# EAGLE board Sborka TMFM (EAGLE 6.0)
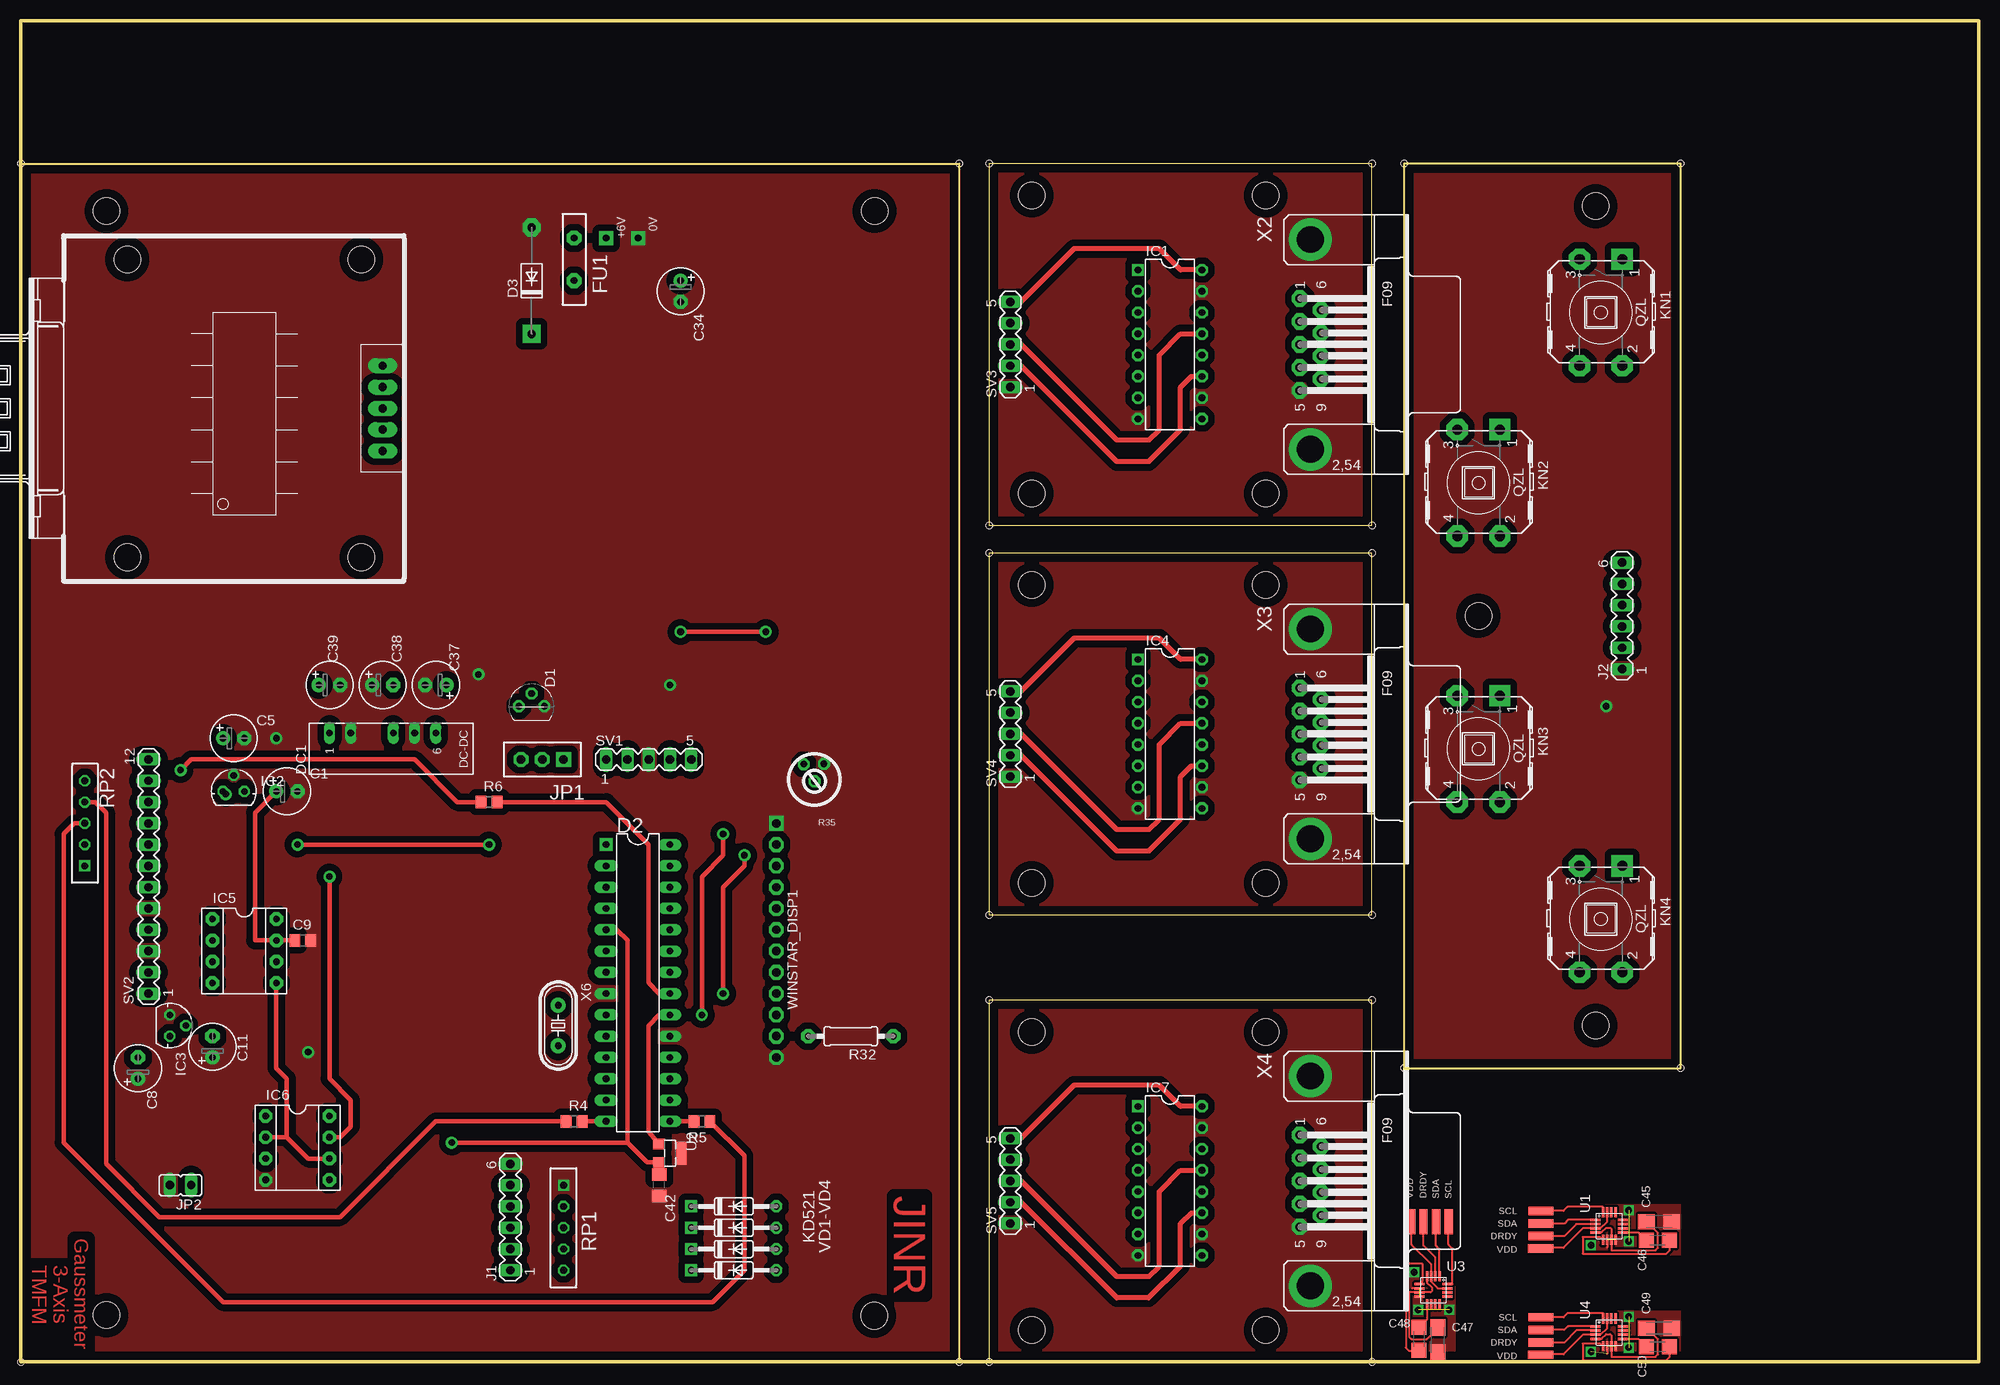
[diagram p0: board, top side]
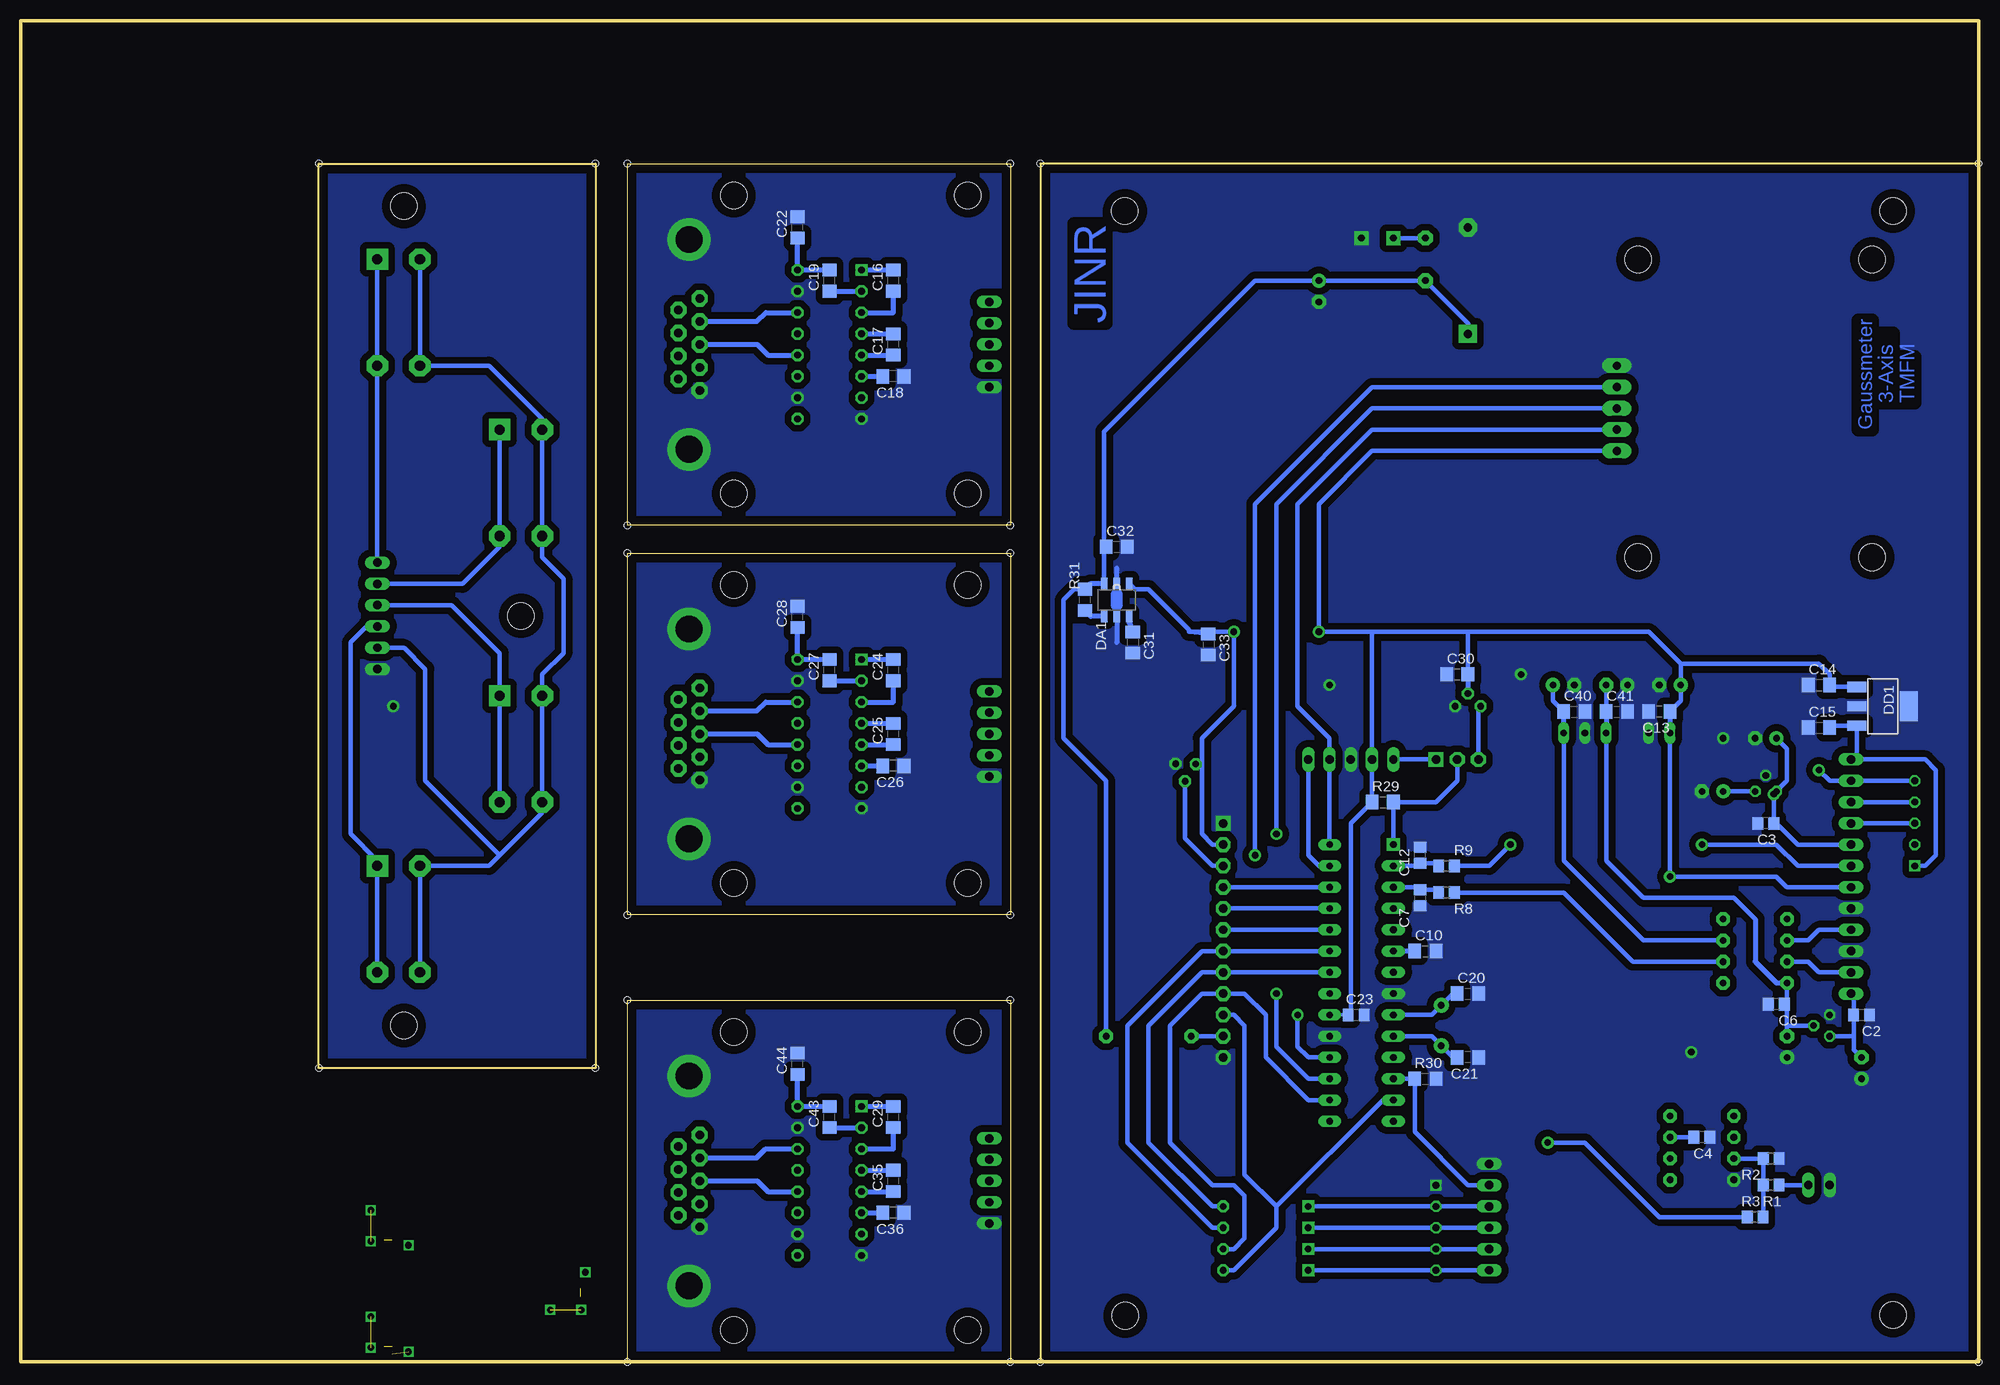
[diagram p1: board, bottom side, seen from below]

Size 233.68 x 160.02 mm. Coordinates in mm from the lower left corner, seen from the top.
Outline: 162.56,0 0,0 0,160.02 233.68,160.02 233.68,0 162.56,0
Outline: 116.84,0 162.56,0
Outline: 0,143.51 0,0.51
Outline: 0,143 112,143 112,0 0,0 0,143
Outline: 161.29,99.82 161.29,142.98 115.57,143 115.57,99.82 161.29,99.82
Outline: 161.29,53.34 161.29,96.5 115.57,96.52 115.57,53.34 161.29,53.34
Outline: 161.29,0 161.29,43.16 115.57,43.18 115.57,0 161.29,0
Outline: 165.1,143 165.1,35.05 198.12,35.05 198.12,143 165.1,143
Copper layers (1*16): Top 0.035mm / dielectric 1.5mm / Bottom 0.035mm
Design rules: minimum track width 10mil, minimum drill 24mil, track to track 8mil, track to pad 8mil, pad to pad 8mil, via to via 8mil, smd to smd 8mil, copper to edge 40mil, drill to drill 8mil, minimum pad ring 10mil, minimum via ring 8mil, stop-mask expansion 4mil, vias tented up to drill 0mil, thermal gap 10mil
Holes 3.2 mm at 101.91,137.34 101.85,5.5 10.21,137.34 10.21,5.57 148.59,139.19 148.59,103.63 120.65,103.63 120.65,139.19 148.59,92.71 148.59,57.15 120.65,57.15 120.65,92.71 148.59,39.37 148.59,3.81 120.65,3.81 120.65,39.37 187.96,137.92 187.96,40.13 173.99,89.03
Holes 0.8 mm at 0,143 112.01,143 112.01,0 0,0 161.29,99.82 161.29,143 115.57,143 115.57,99.82 161.29,53.34 161.29,96.52 115.57,96.52 115.57,53.34 161.29,0 161.29,43.18 115.57,43.18 115.57,0 198.12,143 165.1,143 165.1,35.05 198.12,35.05

## Footprints (pad centres in the part's own frame; a part is rotated, then mirrored left to right if it is on the bottom)
PIN1 = drill 0.8 pad 1.676 square: P$1 0,0
E2,5-6 = drill 0.8 pad 1.676: + -1.27,0 | drill 0.8 pad 1.676 octagon: - 1.27,0
C0805 = smd 1.3 x 1.5: 1 -0.95,0; 2 0.95,0
C0805D = smd 1.5 x 1.7: 1 -1.27,0; 2 1.27,0
C1206K = smd 2 x 1.8: 1 -1.5,0; 2 1.5,0
C0805K = smd 1.8 x 1.8: 1 -1.381,0; 2 1.381,0
TO92-60 = drill 0.8 pad 1.422 octagon: 1 -1.524,0; 2 0,1.524; 3 1.524,0
DIL28-3 = drill 0.8 pad 1.5 square: 1 -16.51,-3.81 | drill 0.8 pad 1.4 long: 2 -13.97,-3.81; 3 -11.43,-3.81; 4 -8.89,-3.81; 5 -6.35,-3.81; 6 -3.81,-3.81; 7 -1.27,-3.81; 8 1.27,-3.81; 9 3.81,-3.81; 10 6.35,-3.81; 11 8.89,-3.81; 12 11.43,-3.81; 13 13.97,-3.81; 14 16.51,-3.81; 15 16.51,3.81; 16 13.97,3.81; 17 11.43,3.81; 18 8.89,3.81; 19 6.35,3.81; 20 3.81,3.81; 21 1.27,3.81; 22 -1.27,3.81; 23 -3.81,3.81; 24 -6.35,3.81; 25 -8.89,3.81; 26 -11.43,3.81; 27 -13.97,3.81; 28 -16.51,3.81
DO41-10 = drill 1 pad 2.184 octagon: A 12.7,0 | drill 1 pad 2.184 square: C 0,0
SOT89-5 = smd 0.8 x 1.4: 1 -1.499,-1.981; 2 0,-1.981; 3 1.499,-1.981; 4 1.499,1.919; 5 -1.499,1.919; 21 0,1.919
NMA@1 = drill 0.8 long: 1 0,6.35; 2 0,3.81; 4 0,-1.27; 5 0,-3.81; 6 0,-6.35
SOT223 = smd 1.219 x 2.235: GND 0,-3.099; INPUT -2.311,-3.099; OUTPUT 2.311,-3.099 | smd 3.6 x 2.2: GND@1 0,3.099
RA90 = drill 0.8 pad 1.778 octagon: P$1 -2.54,0; P$2 2.54,0
DIL16 = drill 0.8 pad 1.422 square: 1 -8.89,-3.81 | drill 0.8 pad 1.422 octagon: 2 -6.35,-3.81; 3 -3.81,-3.81; 4 -1.27,-3.81; 5 1.27,-3.81; 6 3.81,-3.81; 7 6.35,-3.81; 8 8.89,-3.81; 9 8.89,3.81; 10 6.35,3.81; 11 3.81,3.81; 12 1.27,3.81; 13 -1.27,3.81; 14 -3.81,3.81; 15 -6.35,3.81; 16 -8.89,3.81
78LXX = drill 0.8 octagon: GND 0,1.905; IN 1.27,0; OUT -1.27,0
79LXX = drill 0.8 octagon: GND -1.27,0; IN 0,1.905; OUT 1.27,0
DIL08@1 = drill 0.8 pad 1.6 octagon: 1 -3.81,-3.81; 2 -1.27,-3.81; 3 1.27,-3.81; 4 3.81,-3.81; 5 3.81,3.81; 6 1.27,3.81; 7 -1.27,3.81; 8 -3.81,3.81
MA06-1@1 = drill 1 long: 1 -6.35,0; 2 -3.81,0; 3 -1.27,0; 4 1.27,0; 5 3.81,0; 6 6.35,0
MA06-1 = drill 1 long: 1 -6.35,0; 2 -3.81,0; 3 -1.27,0; 4 1.27,0; 5 3.81,0; 6 6.35,0
PLC-3PIN = drill 1 pad 1.778 square: P$1 0,0 | drill 1 pad 1.778 octagon: P$2 2.54,0; P$3 5.08,0
JP1@1 = drill 1 long: 1 0,-1.27; 2 0,1.27
LZQ-KN = drill 1.2 pad 2.54 square: 1 -6.35,2.54 | drill 1.2 pad 2.54 octagon: 2 6.35,2.54; 3 -6.35,-2.54; 4 6.35,-2.54
1_PIN_PLANAR = smd 3 x 1: P$1 0,0
R0805 = smd 1.3 x 1.5: 1 -0.95,0; 2 0.95,0
R0805D = smd 1.5 x 1.7: P$1 -1.27,0; P$2 1.27,0
0207/10 = drill 0.8 pad 1.676 octagon: 1 -5.08,0; 2 5.08,0
RTRIM3329H = drill 0.8 pad 1.422 octagon: 1 -0.599,-2.024; 2 1.805,-1.985; 3 0.537,0.066
SIP5 = drill 0.8 square: 1 0,0 | drill 0.8 octagon: 2 0,-2.54; 3 0,-5.08; 4 0,-7.62; 5 0,-10.16
MA05-1@1 = drill 1 long: 1 -5.08,0; 2 -2.54,0; 3 0,0; 4 2.54,0; 5 5.08,0
MA12-1 = drill 1 long: 1 -13.97,0; 2 -11.43,0; 3 -8.89,0; 4 -6.35,0; 5 -3.81,0; 6 -1.27,0; 7 1.27,0; 8 3.81,0; 9 6.35,0; 10 8.89,0; 11 11.43,0; 12 13.97,0
MA05-1 = drill 1 long: 1 -5.08,0; 2 -2.54,0; 3 0,0; 4 2.54,0; 5 5.08,0
QFN16-4X4 = smd 1.2 x 0.3: P$1 1.647,0.832; P$2 1.647,0.332; P$3 1.647,-0.168; P$4 1.647,-0.668; P$9 -1.671,-0.672; P$10 -1.671,-0.172; P$11 -1.671,0.328; P$12 -1.671,0.828 | smd 0.3 x 1.2: P$5 0.718,-1.563; P$6 0.218,-1.563; P$7 -0.282,-1.563; P$8 -0.782,-1.563; P$13 -0.779,1.745; P$14 -0.279,1.745; P$15 0.221,1.745; P$16 0.721,1.745
SOT23-W = smd 2.8 x 1.4: GND 0,1.3 | smd 1.2 x 1.4: IN -1.1,-1.3; OUT 1.1,-1.3
DO35-10 = drill 0.8 pad 1.422 octagon: A 5.08,0 | drill 0.8 pad 1.422 square: C -5.08,0
WINSTAR16X4_12 = drill 1 pad 1.778 square: P$1 -13.97,1.27 | drill 1 pad 1.778 octagon: P$2 -11.43,1.27; P$3 -8.89,1.27; P$4 -6.35,1.27; P$5 -3.81,1.27; P$6 -1.27,1.27; P$7 1.27,1.27; P$8 3.81,1.27; P$9 6.35,1.27; P$10 8.89,1.27; P$11 11.43,1.27; P$12 13.97,1.27
KM_RS_232 = drill 1 pad 1.778 long: 1 20.32,5.08; 2 20.32,2.54; 3 20.32,0; 4 20.32,-2.54; 5 20.32,-5.08 | hole 3.2: -10.16,17.78; -10.16,-17.78; 17.78,17.78; 17.78,-17.78
F09HP = drill 1 pad 1.93 octagon: 1 -5.486,-1.27; 2 -2.743,-1.27; 3 0,-1.27; 4 2.743,-1.27; 5 5.486,-1.27; 6 -4.115,1.27; 7 -1.372,1.27; 8 1.372,1.27; 9 4.115,1.27 | drill 3.2 pad 5.08: G1 -12.522,0; G2 12.522,0
HC49/S = drill 0.8 pad 1.778: 1 -2.413,0; 2 2.413,0

## Placement (x,y rotation side)
0V  PIN1  [PIN1]  73.66,134.11 270 top
+6V  PIN1  [PIN1]  69.85,134.11 270 top
C1  100 uF  [E2,5-6]  31.75,68.07 0 top
C2  0.1  [C0805]  13.97,41.4 0 bottom
C3  0.1  [C0805]  25.4,64.26 180 bottom
C4  0,1  [C0805]  33.02,26.8 180 bottom
C5  100 uF  [E2,5-6]  25.4,74.42 0 top
C6  0,1  [C0805]  24.13,42.67 180 bottom
C7  0,1  [C0805]  66.67,55.37 270 bottom
C8  100 uF  [E2,5-6]  13.97,35.05 90 top
C9  0,1  [C0805]  33.66,50.29 0 top
C10  0.1  [C0805D]  66.04,49.02 0 bottom
C11  100 uF  [E2,5-6]  22.86,37.59 90 top
C12  0.1  [C0805]  66.67,60.45 90 bottom
C13  100n  [C0805D]  38.1,77.6 180 bottom
C14  0.1  [C0805D]  19.05,80.77 0 bottom
C15  10uF  [C0805D]  19.05,75.69 0 bottom
C16  [C0805D]  129.54,129.03 90 bottom
C17  [C0805D]  129.54,121.41 90 bottom
C18  [C0805D]  129.54,117.6 180 bottom
C19  [C0805D]  137.16,129.03 90 bottom
C20  16p  [C0805D]  60.96,43.94 0 bottom
C21  16p  [C0805D]  60.96,36.32 180 bottom
C22  [C0805D]  140.97,135.38 90 bottom
C23  0.1  [C0805]  74.3,41.4 0 bottom
C24  [C0805D]  129.54,82.55 90 bottom
C25  [C0805D]  129.54,74.93 90 bottom
C26  [C0805D]  129.54,71.12 180 bottom
C27  [C0805D]  137.16,82.55 90 bottom
C28  [C0805D]  140.97,88.9 90 bottom
C29  [C0805D]  129.54,29.21 90 bottom
C30  0.1  [C0805D]  62.23,82.04 0 bottom
C31  10n  [C0805D]  100.97,85.85 270 bottom
C32  [C0805D]  102.87,97.28 0 bottom
C33  1uF  [C0805D]  91.95,85.6 270 bottom
C34  100uFx25v  [E2,5-6]  78.74,127.76 270 top
C35  [C0805D]  129.54,21.59 90 bottom
C36  [C0805D]  129.54,17.78 180 bottom
C37  100uFx25V  [E2,5-6]  49.53,80.77 180 top
C38  100uFx25V  [E2,5-6]  43.18,80.77 0 top
C39  100uFx25V  [E2,5-6]  36.83,80.77 0 top
C40  0.1  [C0805D]  48.26,77.6 0 bottom
C41  0.1  [C0805D]  43.18,77.6 0 bottom
C42  1uF  [C0805D]  76.2,21.08 90 top
C43  [C0805D]  137.16,29.21 90 bottom
C44  [C0805D]  140.97,35.56 90 bottom
C45  4.7  [C1206K]  195.53,16.73 0 top
C46  0.22  [C0805K]  195.38,14.49 0 top
C47  4.7  [C1206K]  169.13,2.59 270 top
C48  0.22  [C0805K]  166.89,2.74 270 top
C49  4.7  [C1206K]  195.53,4.03 0 top
C50  0.22  [C0805K]  195.38,1.79 0 top
D1  DS1811  [TO92-60]  60.96,78.23 0 top
D2  PIC18F25k80DIP  [DIL28-3]  73.66,45.21 270 top
D3  1N5061  [DO41-10]  60.96,122.68 90 top
DA1  NJM2880  [SOT89-5]  102.87,90.93 0 bottom
DC1  [NMA@1]  43.18,75.06 90 top
DD1  LM2937  [SOT223]  11.43,78.23 270 bottom
FU1  RA90  [RA90]  66.04,131.57 270 top
IC1  MAX232  [DIL16]  137.16,121.41 270 top
IC2  78L05  [78LXX]  25.4,68.07 0 top
IC3  79L05  [79LXX]  17.78,40.13 270 top
IC4  MAX232  [DIL16]  137.16,74.93 270 top
IC5  INA128P  [DIL08@1]  26.67,49.02 270 top
IC6  OPA340P  [DIL08@1]  33.02,25.53 270 top
IC7  MAX232  [DIL16]  137.16,21.59 270 top
J1  [MA06-1@1]  58.42,17.27 90 top
J2  [MA06-1]  191.13,89.03 90 top
JP1  JP3PIN  [PLC-3PIN]  64.77,71.88 180 top
JP2  [JP1@1]  19.05,21.08 90 top
KN1  LZQ-KN  [LZQ-KN]  188.59,125.22 270 top
KN2  LZQ-KN  [LZQ-KN]  173.99,104.9 270 top
KN3  LZQ-KN  [LZQ-KN]  173.99,73.15 270 top
KN4  LZQ-KN  [LZQ-KN]  188.59,52.83 270 top
P1  SDA  [1_PIN_PLANAR]  181.42,16.51 180 top
P2  VDD 3.3  [1_PIN_PLANAR]  181.41,13.54 180 top
P3  SCL  [1_PIN_PLANAR]  181.41,18.02 180 top
P4  VDD 3.3  [1_PIN_PLANAR]  165.94,16.71 90 top
P5  DRDY  [1_PIN_PLANAR]  181.42,15 0 top
P6  SDA  [1_PIN_PLANAR]  168.91,16.7 90 top
P7  SCL  [1_PIN_PLANAR]  170.42,16.71 90 top
P8  DRDY  [1_PIN_PLANAR]  167.4,16.7 270 top
P9  VDD 3.3  [1_PIN_PLANAR]  181.41,0.84 180 top
P10  SDA  [1_PIN_PLANAR]  181.42,3.81 180 top
P11  SCL  [1_PIN_PLANAR]  181.41,5.32 180 top
P12  DRDY  [1_PIN_PLANAR]  181.42,2.3 0 top
R1  [R0805]  26.67,17.27 180 bottom
R2  [R0805]  24.77,24.26 180 bottom
R3  [R0805]  24.77,21.08 180 bottom
R4  330  [R0805]  66.04,28.7 0 top
R5  330  [R0805]  81.28,28.7 180 top
R6  330  [R0805]  55.88,66.8 0 top
R8  1k  [R0805]  63.5,56.01 180 bottom
R9  1k  [R0805]  63.5,59.18 180 bottom
R29  10k  [R0805D]  71.12,66.8 0 bottom
R30  10k  [R0805D]  66.04,33.78 0 bottom
R31  10K  [R0805D]  106.68,90.93 90 bottom
R32  [0207/10]  99.06,38.86 180 top
R35  15K  [RTRIM3329H]  95.25,69.34 180 top
RP1  [SIP5]  64.77,21.08 0 top
RP2  10k  [SIP5]  7.62,59.18 180 top
SV1  [MA05-1@1]  74.93,71.88 0 top
SV2  [MA12-1]  15.24,57.91 90 top
SV3  [MA05-1]  118.11,121.41 90 top
SV4  [MA05-1]  118.11,74.93 90 top
SV5  [MA05-1]  118.11,21.59 90 top
U1  HMC5883  [QFN16-4X4]  189.67,16.22 90 top
U2  REF3140  [SOT23-W]  77.47,24.89 270 top
U3  HMC5883  [QFN16-4X4]  168.62,8.45 0 top
U4  HMC5883  [QFN16-4X4]  189.67,3.52 90 top
VD1  KD521  [DO35-10]  85.09,18.54 0 top
VD2  KD521  [DO35-10]  85.09,16 0 top
VD3  KD521  [DO35-10]  85.09,13.46 0 top
VD4  KD521  [DO35-10]  85.09,10.92 0 top
WINSTAR_DISP1  [WINSTAR16X4_12]  88.9,50.29 270 top
X1  [KM_RS_232]  22.86,113.79 0 top
X2  [F09HP]  153.92,121.41 270 top
X3  [F09HP]  153.92,74.93 270 top
X4  [F09HP]  153.92,21.59 270 top
X6  10 MHz  [HC49/S]  64.14,40.13 270 top

## Library data of the parts
0V +6V C10 C13-C22 C24-C33 C35 C36 C40-C44 D1-D3 DA1 FU1 IC1 IC4 IC7 JP1 R29-R32 RP1 RP2 VD1-VD4 X6 = den
C1 C5 C8 C11 C34 C37-C39 = D
C2-C4 C6 C7 C9 C12 C23 R1-R6 R8 R9 = rcl
C45-C50 KN1-KN4 P1-P12 R35 U1 U3 U4 WINSTAR_DISP1 X1 = Dmitry
DC1 = dc-dc-converter
DD1 = For TIMP
IC2 IC3 = v-reg
IC5 IC6 = burr-brown
J1 J2 SV1 = con-lstb
JP2 = jumper
SV2-SV5 = con-lstb; OC_FARNELL: unknown; OC_NEWARK: unknown
U2 = ref
X2-X4 = con-subd; OC_FARNELL: unknown; OC_NEWARK: unknown

## Nets
0V: 0V.P$1 C1.- C2.2 C3.2 C4.1 C5.- C6.2 C7.2 C8.+ C9.2 C10.2 C11.+ C12.2 C13.2 C14.1 C15.1 C20.2 C21.1 C23.2 C30.1 C31.2 C32.2 C33.2 C34.- C37.- C38.+ C39.- C40.2 C41.2 C42.1 D1.3 D2.8 D2.19 D3.A DA1.2 DA1.21 DC1.2 DC1.5 DD1.GND DD1.GND@1 IC2.GND IC3.GND IC6.4 J1.6 JP2.2 R2.1 R30.P$2 R35.1 RP1.1 SV1.3 SV2.3 SV2.5 U2.GND WINSTAR_DISP1.P$1 WINSTAR_DISP1.P$12 X1.1
0V1: C18.1 C22.2 IC1.8 IC1.10 IC1.15 SV3.1 X2.5 X2.G1 X2.G2
0V2: C26.1 C28.2 IC4.8 IC4.10 IC4.15 SV4.1 X3.5 X3.G1 X3.G2
0V3: C36.1 C44.2 IC7.8 IC7.10 IC7.15 SV5.1 X4.5 X4.G1 X4.G2
0V4: C45.2 U1.P$9 U1.P$11
0V5: C47.2 U3.P$9 U3.P$11
0V6: C49.2 U4.P$9 U4.P$11
1: U1.P$3
2: U1.P$4
3: U1.P$6
4: U1.P$7
5: U1.P$5
6: U3.P$3
7: U3.P$4
8: U3.P$5
9: U3.P$6
10: U3.P$7
11: U4.P$3
12: U4.P$4
13: U4.P$5
14: U4.P$6
15: U4.P$7
+3V3: C15.2 DD1.OUTPUT RP2.1 SV2.12
+5V: C4.2 C13.1 C14.2 C23.1 C30.2 C33.1 C39.+ D1.2 D2.20 DA1.4 DC1.1 DD1.INPUT IC6.7 R29.P$1 R35.2 SV1.2 SV2.6 U2.IN WINSTAR_DISP1.P$2 X1.5
+5V1: C19.2 C22.1 IC1.16 SV3.5
+5V2: C27.2 C28.1 IC4.16 SV4.5
+5V3: C43.2 C44.1 IC7.16 SV5.5
+5V4: J2.2 KN1.3 KN1.4 KN2.3 KN2.4 KN3.3 KN3.4 KN4.3 KN4.4
+6V: C32.1 C34.+ D3.C DA1.5 FU1.P$2 R31.P$2 R32.1
+15V: C1.+ C9.1 C37.+ C40.1 DC1.6 IC2.IN IC5.7
-15V: C6.1 C11.- C38.- C41.1 DC1.4 IC3.IN IC5.4
AN0: C12.1 D2.2 R9.2
AN1: C7.1 D2.3 R8.2
AN2: D2.4
AN4: D2.7
GND: J2.1
MCLR: JP1.P$1 SV1.1
N$1: J1.2 RP1.4 VD3.C
N$2: C20.1 D2.9 X6.1
N$3: J1.3 RP1.3 VD2.C
N$4: C21.2 D2.10 X6.2
N$5: J1.4 RP1.2 VD1.C
N$6: C16.2 IC1.1
N$7: D2.1 JP1.P$2 R29.P$2
N$8: J1.1 RP1.5 VD4.C
N$9: C16.1 IC1.3
N$10: C17.2 IC1.4
N$11: C2.1 C8.- IC3.OUT SV2.1
N$12: IC5.2 SV2.4
N$13: IC5.3 SV2.2
N$14: IC5.5 IC6.2 IC6.6
N$15: IC6.3 R1.1 R2.2 R3.2
N$16: JP2.1 R3.1
N$17: IC5.6 R8.1
N$18: R4.1 RP2.4 SV2.10
N$19: R32.2 WINSTAR_DISP1.P$11
N$20: R5.1 RP2.3 SV2.9
N$21: +6V.P$1 FU1.P$1
N$22: C17.1 IC1.5
N$23: D1.1 JP1.P$3
N$24: R35.3 WINSTAR_DISP1.P$3
N$25: C10.1 D2.6
N$26: C18.2 IC1.6
N$27: IC1.14 X2.2
N$28: C3.1 C5.+ IC2.OUT SV2.8
N$29: R9.1 SV2.7
N$30: R6.1 RP2.5 SV2.11
N$31: IC1.12 X2.3
N$32: C19.1 IC1.2
N$33: C24.2 IC4.1
N$34: C24.1 IC4.3
N$35: C25.2 IC4.4
N$36: C25.1 IC4.5
N$37: C26.2 IC4.6
N$38: IC4.14 X3.2
N$39: IC4.12 X3.3
N$40: C27.1 IC4.2
N$41: C29.2 IC7.1
N$42: C29.1 IC7.3
N$43: C35.2 IC7.4
N$44: C35.1 IC7.5
N$45: C36.2 IC7.6
N$46: IC7.14 X4.2
N$47: IC7.12 X4.3
N$48: DA1.1 R31.P$1
N$49: C31.1 DA1.3
N$50: C43.1 IC7.2
N$51: J2.6 KN1.1 KN1.2
N$52: J2.5 KN2.1 KN2.2
N$53: J2.4 KN3.1 KN3.2
N$54: J2.3 KN4.1 KN4.2
N$64: C45.1 U1.P$10 U1.P$13
N$65: C46.1 U1.P$8
N$66: C46.2 U1.P$12
N$67: P2.P$1 U1.P$2 U1.P$14
N$68: P3.P$1 U1.P$1
N$69: P1.P$1 U1.P$16
N$70: P5.P$1 U1.P$15
N$71: C47.1 U3.P$10 U3.P$13
N$72: C48.1 U3.P$8
N$73: C48.2 U3.P$12
N$74: P4.P$1 U3.P$2 U3.P$14
N$75: P7.P$1 U3.P$1
N$76: P6.P$1 U3.P$16
N$77: P8.P$1 U3.P$15
N$78: C49.1 U4.P$10 U4.P$13
N$79: C50.1 U4.P$8
N$80: C50.2 U4.P$12
N$81: P9.P$1 U4.P$2 U4.P$14
N$82: P11.P$1 U4.P$1
N$83: P10.P$1 U4.P$16
N$84: P12.P$1 U4.P$15
PGC: D2.27 SV1.5
PGD: D2.28 SV1.4 X1.4
RB0: D2.21 R6.2
RB1: D2.22 VD1.A WINSTAR_DISP1.P$8
RB2: D2.23 VD2.A WINSTAR_DISP1.P$7
RB3: D2.24 WINSTAR_DISP1.P$6
RB4: D2.25 WINSTAR_DISP1.P$5
RB5: D2.26 WINSTAR_DISP1.P$4
RC1: D2.12 J1.5 R30.P$1
RC2: D2.13 VD4.A WINSTAR_DISP1.P$10
RC3: D2.14 R4.2
RC4: D2.15 R5.2
RC5: D2.16 VD3.A WINSTAR_DISP1.P$9
REF: C42.2 D2.5 R1.2 U2.OUT
RX: D2.18 X1.3
RX1: IC1.13 SV3.3
RX2: IC4.13 SV4.3
RX3: IC7.13 SV5.3
TX: D2.17 X1.2
TX1: IC1.11 SV3.2
TX2: IC4.11 SV4.2
TX3: IC7.11 SV5.2

## Tracks (layer width: path | path; a pad name or v marks a point on that pad's centre or on a via)
0V  (via drill 0.8 pad 1.42)
  Bottom 0.61: DA1.2 DA1.21 102.87,94.74 | 102.87,88.39 102.87,85.85
  other vias: 30.48,74.42 34.29,36.96 77.47,80.77 54.61,82.04
  pour Bottom (isolate 0.813, no thermals): 112,143 112,-0.11 0,0 0,143
  pour Top (isolate 0.813, no thermals): 112,143 0,143 0,0 112,0
0V1
  pour Top (isolate 0.813, no thermals): 161.29,99.82 115.57,99.82 115.57,143 161.29,143
  pour Bottom (isolate 0.813, no thermals): 161.29,99.82 115.57,99.82 115.57,143 161.29,143
0V2
  pour Top (isolate 0.813, no thermals): 161.29,53.34 115.57,53.34 115.57,96.52 161.29,96.52
  pour Bottom (isolate 0.813, no thermals): 161.29,53.34 115.57,53.34 115.57,96.52 161.29,96.52
0V3
  pour Top (isolate 0.813, no thermals): 161.29,0 115.57,0 115.57,43.18 161.29,43.18
  pour Bottom (isolate 0.813, no thermals): 161.29,0 115.57,0 115.57,43.18 161.29,43.18
0V4  (via drill 0.8)  (2 unrouted)
  Top 0.254: 189.34,14.25 189.34,13.65
  other vias: 187.42,13.9 191.92,18.1 191.92,14.4
  pour Top (isolate 0.305, no thermals): 179.32,12.7 179.32,18.8 198.12,18.8 198.12,12.7
0V5  (via drill 0.8)  (2 unrouted)
  Top 0.254: 166.65,8.78 166.05,8.78
  other vias: 166.3,10.7 170.5,6.2 166.8,6.2
  pour Top (isolate 0.305, no thermals): 165.1,18.8 171.2,18.8 171.2,0 165.1,0
0V6  (via drill 0.8)  (3 unrouted)
  Top 0.254: 189.34,1.55 189.34,0.95
  other vias: 187.42,1.2 191.92,5.4 191.92,1.7
  pour Top (isolate 0.305, no thermals): 179.32,0 179.32,6.1 198.12,6.1 198.12,0
+3V3
  Bottom 0.508: C15.2 17.55,75.92 DD1.OUTPUT 14.53,72.59 SV2.12 6.35,71.88 5.08,70.61 5.08,60.45 6.35,59.18 RP2.1
+5V  (via drill 0.8 pad 1.42)
  Top 0.508: U2.IN 74.93,27.43 74.93,40.13 76.2,41.4 D2.20 | v78.74,87.12 v88.9,87.12 | v36.83,57.91 36.83,33.78 39.37,31.24 39.37,28.07 38.1,26.8 IC6.7
  Bottom 0.406: C23.1 D2.20
  Bottom 0.508: 74.93,41.72 74.93,64.26 R29.P$1 SV1.2 72.39,87.12 | X1.5 72.39,108.71 78.74,102.36 v78.74,87.12 72.39,87.12 | 72.39,87.12 60.96,87.12 | 60.96,87.12 C30.2 | DC1.1 v36.83,57.91 24.13,57.91 22.86,56.64 SV2.6 | WINSTAR_DISP1.P$2 91.44,61.72 92.71,62.99 92.71,71.33 | 92.71,71.33 92.71,74.42 88.9,78.23 v88.9,87.12 94.23,87.12 | 92.71,71.33 R35.2 | 60.96,87.12 39.37,87.12 35.56,83.31 | 35.56,83.31 C39.+ 35.56,78.87 C13.1 | IC6.7 C4.2 | 94.23,87.12 C33.1 | DD1.INPUT 17.55,80.54 C14.2 17.78,82.04 19.05,83.31 35.56,83.31 | 94.23,87.12 94.23,87.38 99.06,92.2 100.72,92.2 DA1.4
  Bottom 0.61: 74.93,41.72 C23.1 | C30.2 D1.2 | C13.1 DC1.1
+5V1
  Top 0.61: IC1.16 138.43,130.3 135.89,132.84 125.73,132.84 119.38,126.49 SV3.5
  Bottom 0.61: C19.2 IC1.16 C22.1
+5V2
  Top 0.61: IC4.16 138.43,83.82 135.89,86.36 125.73,86.36 119.38,80.01 SV4.5
  Bottom 0.61: C27.2 IC4.16 C28.1
+5V3
  Top 0.61: IC7.16 138.43,30.48 135.89,33.02 125.73,33.02 119.38,26.67 SV5.5
  Bottom 0.61: C43.2 IC7.16 C44.1
+5V4
  Bottom 0.508: KN1.3 KN1.4 177.8,118.87 171.45,112.52 KN2.3 KN2.4 171.45,96.01 168.91,93.47 168.91,84.58 171.45,82.04 KN3.3 KN3.4 171.45,65.53 176.53,60.45 | 176.53,60.45 177.8,59.18 KN4.3 KN4.4 | J2.2 187.96,85.22 185.42,82.68 185.42,69.34 176.53,60.45
+6V
  Bottom 0.508: 60.96,123.95 FU1.P$2 C34.+ 86.36,129.03 104.37,111.02 104.37,97.51 C32.1 104.37,97.05 DA1.5 | R32.1 104.14,69.34 109.22,74.42 109.22,90.93 107.95,92.2 R31.P$2
  Bottom 0.61: R31.P$2 106.03,92.85 DA1.5 | 60.96,123.95 D3.C
+15V
  Top 0.508: C9.1 IC5.7 27.94,50.29 27.94,65.53 C1.+
  Bottom 0.508: DC1.6 49.53,59.82 40.01,50.29 IC5.7 | IC2.IN C1.+ | C37.+ 50.8,78.87 C40.1
  Bottom 0.61: DC1.6 C40.1
-15V
  Bottom 0.508: DC1.4 44.45,59.82 40.01,55.37 29.21,55.37 26.67,52.83 | C38.- C41.1 | IC5.4 22.86,42.99 C6.1 22.86,42.35 22.86,40.13 | 22.86,40.13 C11.- | 22.86,40.13 IC3.IN
  Bottom 0.61: 26.67,52.83 26.67,47.75 24.13,45.21 IC5.4 | C41.1 DC1.4
AN0
  Bottom 0.406: C12.1 67,59.18 | 64.77,59.5 R9.2
  Bottom 0.508: 67,59.18 D2.2 | 64.77,59.5 C12.1
AN1
  Bottom 0.406: C7.1 67,56.64 | R8.2 64.77,56.32
  Bottom 0.508: 67,56.64 D2.3 | 64.77,56.32 C7.1
GND  (via drill 0.8 pad 1.42)
  other vias: 189.23,78.23
  pour Top (isolate 0.813, no thermals): 198.12,143 165.1,143 165.1,35.05 198.12,35.05
  pour Bottom (isolate 0.813, no thermals): 198.12,143 198.12,35.05 165.1,35.05 165.1,143
MCLR
  Bottom 0.508: JP1.P$1 SV1.1
N$1
  Bottom 0.508: J1.2 RP1.4 VD3.C
N$2
  Bottom 0.508: D2.9 65.28,41.4 X6.1 62.74,43.94 C20.1
N$3
  Bottom 0.508: J1.3 RP1.3 VD2.C
N$4
  Bottom 0.508: D2.10 65.28,38.86 X6.2 62.74,36.32 C21.2
N$5
  Bottom 0.508: J1.4 RP1.2 VD1.C
N$6
  Bottom 0.61: IC1.1 C16.2
N$7
  Bottom 0.508: D2.1 R29.P$2 64.77,66.8 62.23,69.34 JP1.P$2
N$8
  Bottom 0.508: J1.1 RP1.5 VD4.C
N$9
  Bottom 0.61: C16.1 129.54,125.22 IC1.3
N$10
  Bottom 0.61: IC1.4 C17.2
N$11
  Bottom 0.508: 14.92,38.86 C2.1 14.92,43.62 SV2.1 | 14.92,38.86 14.92,37.27 C8.- | 14.92,38.86 IC3.OUT
N$12
  Bottom 0.508: IC5.2 20.32,50.29 19.05,51.56 SV2.4
N$13
  Bottom 0.508: IC5.3 20.32,47.75 19.05,46.48 SV2.2
N$14
  Top 0.508: IC5.5 30.48,35.05 31.75,33.78 31.75,26.8 | 31.75,26.8 IC6.2 | 31.75,26.8 34.29,24.26 IC6.6
N$15
  Bottom 0.508: R1.1 R3.2 R2.2 IC6.3
N$16
  Bottom 0.508: JP2.1 R3.1
N$17
  Bottom 0.508: IC5.6 41.27,47.75 49.53,56.01 R8.1
N$18
  Top 0.508: RP2.4 8.89,66.8 10.16,65.53 10.16,23.62 16.51,17.27 38.1,17.27 49.53,28.7 R4.1
  Bottom 0.508: RP2.4 SV2.10
N$19
  Bottom 0.508: WINSTAR_DISP1.P$11 R32.2
N$20
  Top 0.508: R5.1 86.36,24.57 86.36,10.92 82.55,7.11 24.13,7.11 5.08,26.16 5.08,62.99 6.35,64.26 RP2.3
  Bottom 0.508: RP2.3 SV2.9
N$21
  Bottom 0.508: FU1.P$1 +6V.P$1
N$22
  Bottom 0.61: IC1.5 C17.1
N$23
  Bottom 0.508: 59.69,77.98 JP1.P$3
  Bottom 0.61: D1.1 59.69,77.98
N$24
  Bottom 0.508: WINSTAR_DISP1.P$3 91.44,59.18 94.71,62.45 R35.3
N$25
  Bottom 0.61: C10.1 D2.6
N$26
  Bottom 0.61: IC1.6 C18.2
N$27
  Bottom 0.61: IC1.14 144.78,125.22 145.85,124.16 X2.2
N$28  (via drill 0.8 pad 1.42)
  Bottom 0.508: C5.+ 22.86,73.15 22.86,69.34 IC2.OUT v24.45,67.75 C3.1 24.13,64.26 21.59,61.72 SV2.8
N$29  (via drill 0.8 pad 1.42)
  Top 0.508: v33.02,61.72 v55.88,61.72
  Bottom 0.508: R9.1 58.42,59.18 v55.88,61.72 | v33.02,61.72 24.13,61.72 21.59,59.18 SV2.7
N$30  (via drill 0.8 pad 1.42)
  Top 0.508: v19.05,70.61 20.32,71.88 46.99,71.88 52.07,66.8 R6.1
  Bottom 0.508: RP2.5 SV2.11 17.78,69.34 v19.05,70.61
N$31
  Bottom 0.61: IC1.12 144.53,120.14 145.8,121.41 X2.3
N$32
  Bottom 0.61: C19.1 IC1.2
N$33
  Bottom 0.61: IC4.1 C24.2
N$34
  Bottom 0.61: C24.1 129.54,78.74 IC4.3
N$35
  Bottom 0.61: IC4.4 C25.2
N$36
  Bottom 0.61: IC4.5 C25.1
N$37
  Bottom 0.61: IC4.6 C26.2
N$38
  Bottom 0.61: IC4.14 144.78,78.74 145.85,77.67 X3.2
N$39
  Bottom 0.61: IC4.12 144.53,73.66 145.8,74.93 X3.3
N$40
  Bottom 0.61: C27.1 IC4.2
N$41
  Bottom 0.61: IC7.1 C29.2
N$42
  Bottom 0.61: C29.1 129.54,25.4 IC7.3
N$43
  Bottom 0.61: IC7.4 C35.2
N$44
  Bottom 0.61: IC7.5 C35.1
N$45
  Bottom 0.61: IC7.6 C36.2
N$46
  Bottom 0.61: IC7.14 144.78,25.4 145.85,24.33 X4.2
N$47
  Bottom 0.61: IC7.12 144.53,20.32 145.8,21.59 X4.3
N$48
  Bottom 0.61: R31.P$1 105.97,88.95 DA1.1
N$49
  Bottom 0.61: DA1.3 101.37,88.16 C31.1
N$50
  Bottom 0.61: C43.1 IC7.2
N$51
  Bottom 0.508: J2.6 KN1.2 KN1.1
N$52
  Bottom 0.508: J2.5 180.97,92.84 176.53,97.28 KN2.2 KN2.1
N$53
  Bottom 0.508: J2.4 182.25,90.3 176.53,84.58 KN3.1 KN3.2
N$54
  Bottom 0.508: J2.3 192.41,87.76 194.31,85.85 194.31,62.99 191.13,59.82 KN4.1 KN4.2
N$64
  Top 0.254: C45.1 193.46,16.7 193.96,16.7 193.92,16.5 194.32,16.5 195.42,15.4 195.42,13.6 195.12,13.3 189.85,13.3 U1.P$10 189.84,14.57 189.84,15.9 189.72,16 189.22,16 188.66,15.44 U1.P$13
N$65
  Top 0.254: U1.P$8 193.08,15.44 193.62,14.9 193.62,14.87 C46.1
N$66
  Top 0.254: 188.85,14.1 U1.P$12 188.5,14.9 186.42,14.9 186.42,12.9 196.42,12.9 196.82,13.3 196.82,14.43 C46.2
N$67
  Top 0.254: P2.P$1 181.47,13.6 184.12,13.6 186.46,15.94 U1.P$14 188.56,15.94 189.34,16.73 U1.P$2
N$68
  Top 0.254: U1.P$1 188.84,18.5 184.62,18.5 184.12,18 182.02,18 182,18.02 P3.P$1
N$69
  Top 0.254: U1.P$16 184.66,16.94 184.22,16.5 182.22,16.5 182.12,16.6 181.51,16.6 P1.P$1
N$70
  Top 0.254: U1.P$15 185.66,16.44 184.22,15 182.42,15 182.32,15.1 182.12,15.1 182.02,15 P5.P$1
N$71
  Top 0.254: C47.1 169.1,4.66 169.1,4.16 168.9,4.2 168.9,3.8 167.8,2.7 166,2.7 165.7,3 165.7,8.27 U3.P$10 166.97,8.28 168.3,8.28 168.4,8.4 168.4,8.9 167.84,9.46 U3.P$13
N$72
  Top 0.254: U3.P$8 167.84,5.04 167.3,4.5 167.27,4.5 C48.1
N$73
  Top 0.254: 166.5,9.27 U3.P$12 167.3,9.62 167.3,11.7 165.3,11.7 165.3,1.7 165.7,1.3 166.83,1.3 C48.2
N$74
  Top 0.254: P4.P$1 166,16.65 166,14 168.34,11.66 U3.P$14 168.34,9.56 169.12,8.78 U3.P$2
N$75
  Top 0.254: U3.P$1 170.9,9.28 170.9,13.5 170.4,14 170.4,16.1 170.42,16.12 P7.P$1
N$76
  Top 0.254: U3.P$16 169.34,13.46 168.9,13.9 168.9,15.9 169,16 169,16.61 P6.P$1
N$77
  Top 0.254: U3.P$15 168.84,12.46 167.4,13.9 167.4,15.7 167.5,15.8 167.5,16 167.4,16.1 P8.P$1
N$78
  Top 0.254: C49.1 193.46,4 193.96,4 193.92,3.8 194.32,3.8 195.42,2.7 195.42,0.9 195.12,0.6 189.85,0.6 U4.P$10 189.84,1.88 189.84,3.2 189.72,3.3 189.22,3.3 188.66,2.74 U4.P$13
N$79
  Top 0.254: U4.P$8 193.08,2.74 193.62,2.2 193.62,2.17 C50.1
N$80
  Top 0.254: 188.85,1.4 U4.P$12 188.5,2.2 186.42,2.2 186.42,0.2 196.42,0.2 196.82,0.6 196.82,1.73 C50.2
N$81
  Top 0.254: P9.P$1 181.47,0.9 184.12,0.9 186.46,3.24 U4.P$14 188.56,3.24 189.34,4.03 U4.P$2
N$82
  Top 0.254: U4.P$1 188.84,5.8 184.62,5.8 184.12,5.3 182.02,5.3 182,5.32 P11.P$1
N$83
  Top 0.254: U4.P$16 184.66,4.24 184.22,3.8 182.22,3.8 182.12,3.9 181.51,3.9 P10.P$1
N$84
  Top 0.254: U4.P$15 185.66,3.74 184.22,2.3 182.42,2.3 182.32,2.4 182.12,2.4 182.02,2.3 P12.P$1
PGC
  Bottom 0.508: 78.74,59.18 80.01,60.45 SV1.5
  Bottom 0.61: 78.74,59.18 D2.27
PGD
  Bottom 0.508: X1.4 72.39,111.25 81.28,102.36 81.28,78.23 77.47,74.42 SV1.4 D2.28
RB0
  Top 0.508: R6.2 69.85,66.8 74.93,61.72 74.93,45.21 76.2,43.94 D2.21
RB1
  Bottom 0.508: D2.22 WINSTAR_DISP1.P$8 92.71,46.48 99.06,40.13 99.06,26.16 91.44,18.54 VD1.A
RB2
  Bottom 0.508: D2.23 WINSTAR_DISP1.P$7 92.71,49.02 101.6,40.13 101.6,26.16 91.44,16 VD2.A
RB3
  Bottom 0.508: D2.24 WINSTAR_DISP1.P$6
RB4
  Bottom 0.508: D2.25 WINSTAR_DISP1.P$5
RB5
  Bottom 0.508: D2.26 WINSTAR_DISP1.P$4
RC1
  Bottom 0.508: D2.12 R30.P$1 67.31,27.43 60.96,21.08 J1.5
RC2
  Bottom 0.508: D2.13 71.12,31.24 83.82,18.54 | VD4.A 88.9,10.92 83.82,16 83.82,18.54 | WINSTAR_DISP1.P$10 88.9,41.4 87.63,40.13 87.63,22.35 83.82,18.54
RC3
  Top 0.508: R4.2 D2.14
RC4
  Top 0.508: D2.15 R5.2
RC5
  Bottom 0.508: D2.16 80.01,31.24 85.09,36.32 85.09,41.4 87.63,43.94 WINSTAR_DISP1.P$9 92.71,43.94 96.52,40.13 96.52,26.16 91.44,21.08 88.9,21.08 87.63,19.81 87.63,14.73 88.9,13.46 VD3.A
REF  (via drill 0.8 pad 1.42)
  Top 0.508: 72.39,26.16 72.39,50.29 71.12,51.56 | 72.39,26.16 74.76,23.79 U2.OUT | v51.44,26.16 72.39,26.16
  Top 0.61: 71.12,51.56 D2.5 | U2.OUT 76.2,23.76
  Top 1.27: 76.2,23.76 C42.2
  Bottom 0.508: v51.44,26.16 46.99,26.16 38.1,17.27 R1.2
RX  (via drill 0.8 pad 1.42)
  Top 0.508: v81.28,41.4 81.28,57.91 83.82,60.45 v83.82,62.99
  Bottom 0.508: D2.18 80.01,36.32 81.28,37.59 v81.28,41.4 | X1.3 72.39,113.79 83.82,102.36 v83.82,62.99
RX1
  Top 0.61: IC1.13 138.43,122.68 135.89,120.14 135.89,111.25 134.62,109.98 130.81,109.98 119.38,121.41 SV3.3
RX2
  Top 0.61: IC4.13 138.43,76.2 135.89,73.66 135.89,64.77 134.62,63.5 130.81,63.5 119.38,74.93 SV4.3
RX3
  Top 0.61: IC7.13 138.43,22.86 135.89,20.32 135.89,11.43 134.62,10.16 130.81,10.16 119.38,21.59 SV5.3
S$2
  Top 0.254: 116.84,0 162.56,0
TX  (via drill 0.8 pad 1.42)
  Top 0.508: v83.82,43.94 83.82,56.64 86.36,59.18 v86.36,60.45
  Bottom 0.508: D2.17 80.01,33.78 83.82,37.59 v83.82,43.94 | X1.2 72.39,116.33 86.36,102.36 v86.36,60.45
TX1
  Top 0.61: IC1.11 139.7,117.6 138.43,116.33 138.43,111.25 134.62,107.44 130.81,107.44 119.38,118.87 SV3.2
TX2
  Top 0.61: IC4.11 139.7,71.12 138.43,69.85 138.43,64.77 134.62,60.96 130.81,60.96 119.38,72.39 SV4.2
TX3
  Top 0.61: IC7.11 139.7,17.78 138.43,16.51 138.43,11.43 134.62,7.62 130.81,7.62 119.38,19.05 SV5.2

## Text on the board
Top: JINR | Gaussmeter | TMFM | 3-Axis
Bottom: JINR | TMFM | 3-Axis | Gaussmeter
tPlace: SDA
tNames: VD1-VD4 | KD521 | VDD | DRDY | SDA | SCL | SCL | DRDY | VDD | SCL | SDA | DRDY | VDD
Drill_legend: 3.2000 mm / 125.984 mil | 1.0000 mm / 39.370 mil | 0.8000 mm / 31.496 mil | Drill legend | Date: 05.05.2012 15:04:20 | 3.2000 mm / 125.984 mil | 1.0000 mm / 39.370 mil | 0.8000 mm / 31.496 mil | Drill legend | Date: 05.05.2012 15:04:20 | 3.2000 mm / 125.984 mil | 1.0000 mm / 39.370 mil | 0.8000 mm / 31.496 mil | Drill legend | Date: 05.05.2012 15:04:20 | Date: 05.05.2012 14:55:05 | Drill legend | 0.8000 mm / 31.496 mil | 1.0000 mm / 39.370 mil | 1.2000 mm / 47.244 mil | 3.2000 mm / 125.984 mil